# Altium PCB PCB1_ASCII.pcbdoc (part 1 of 2)
Units mm, origin at the board's own origin, x right, y up, seen from the top; angles counter-clockwise.
Board outline 100 x 24 mm, 4 copper layers (Top Layer 1, GND, VCC, Bottom Layer 1), stack 0.567 mm thick; 90 components, 59 nets, 339 pads, 337 vias.
Unrouted connection lines stored in the file: 82.
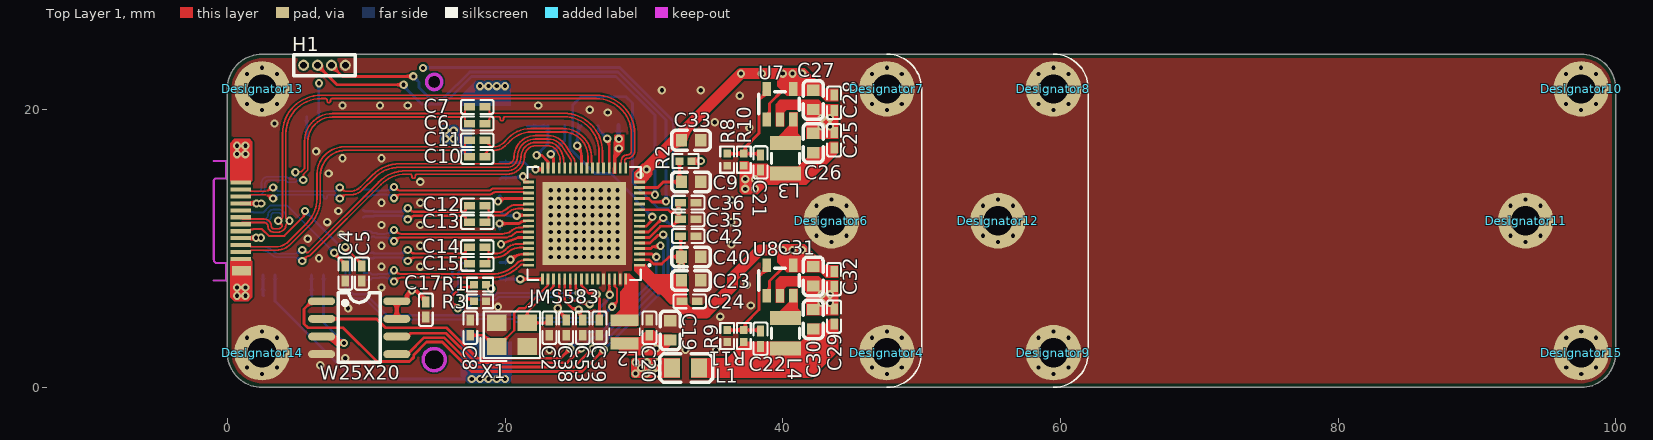
[diagram p0: Top Layer 1 view]
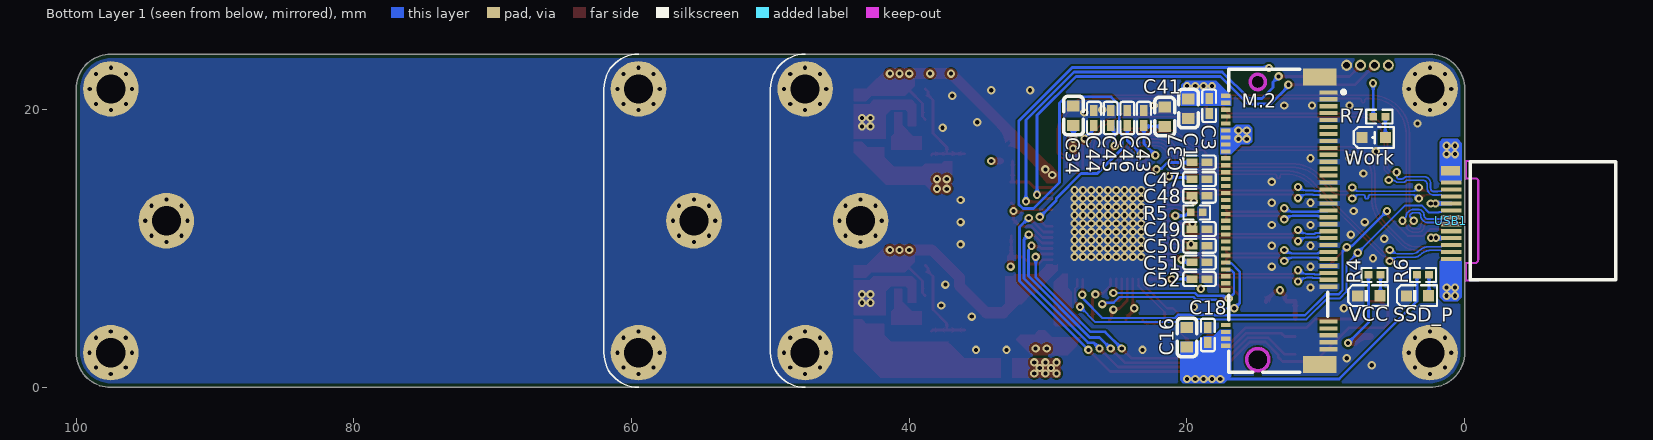
[diagram p1: Bottom Layer 1 view, seen from below]
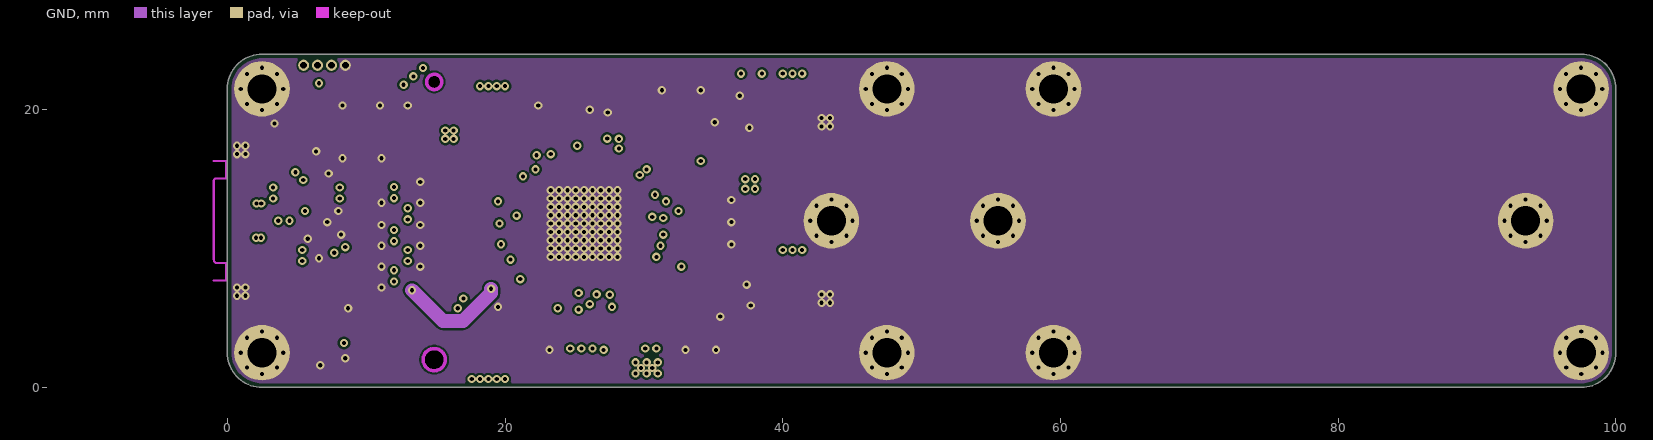
[diagram p2: GND]
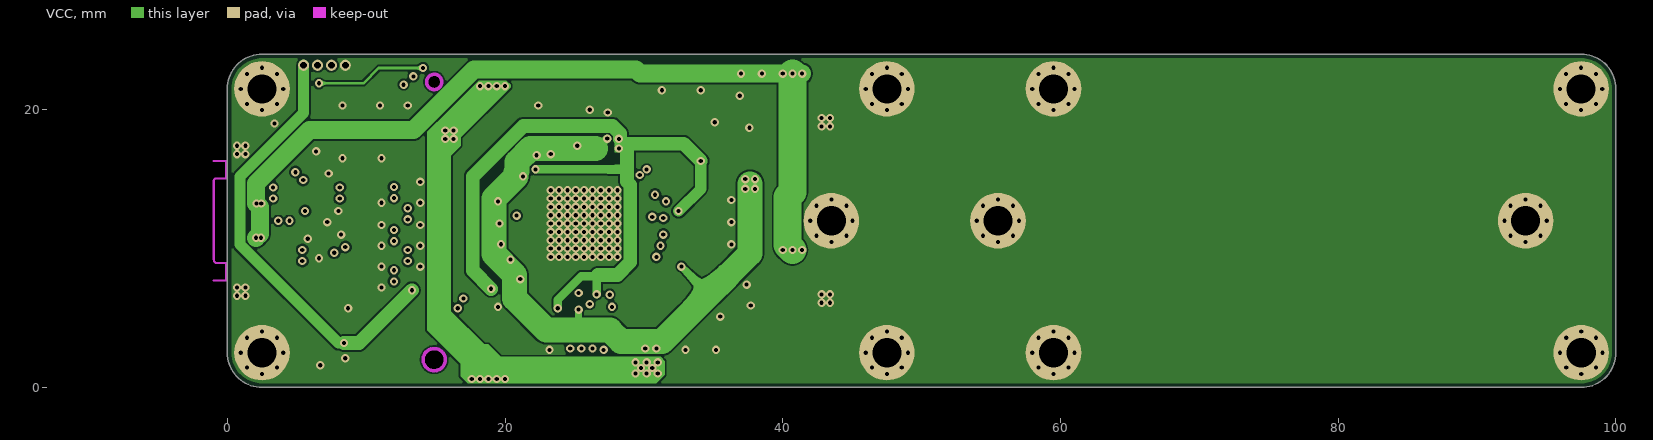
[diagram p3: VCC]

## Layer stack, top to bottom
Top Solder Mask Layer: solder mask 0.0102, Solder Resist, Dk 3.5
Top Layer 1: signal copper 0.035
Dielectric 1: prepreg 0.0711, PP-006, Dk 4.1
GND: signal copper 0.0175
Dielectric1: dielectric 0.32, FR-4, Dk 4.8
VCC: signal copper 0.0175
Dielectric 2: prepreg 0.0711, PP-006, Dk 4.1
Bottom Layer 1: signal copper 0.035
Bottom Solder Mask Layer: solder mask 0.0102, Solder Resist, Dk 3.5

## Board outline
0,2.5 0,21.5 cw(c2.5,21.5) 2.5,24 97.5,24 cw(c97.5,21.5) 100,21.5 100,2.5 cw(c97.5,2.5) 97.5,0 2.5,0 cw(c2.5,2.5)

## Design rules (kind name [scope] priority, off if disabled: settings)
BoardOutlineClearance copperThickness1oz_1 [All] p1: gap=0.254 ignorepadtopadclearanceinfootprint=FALSE except(0: Arc-SplitContinuation Track-SplitContinuation SMDPad-SplitContinuation THPad-SplitContinuation Via-SplitContinuation Fill-SplitContinuation Poly-SplitContinuation Region-SplitContinuation Text-SplitContinuation; 0.152: Track-CutoutEdge SMDPad-CutoutEdge THPad-CutoutEdge Via-CutoutEdge Region-CutoutEdge; 0.3: Track-OutlineEdge SMDPad-OutlineEdge THPad-OutlineEdge Via-OutlineEdge Fill-OutlineEdge Fill-CutoutEdge Poly-OutlineEdge Region-OutlineEdge Text-OutlineEdge)
BoardOutlineClearance copperThickness2oz_1 [All] p2: gap=0.254 ignorepadtopadclearanceinfootprint=FALSE except(0: Arc-SplitContinuation Track-SplitContinuation SMDPad-SplitContinuation THPad-SplitContinuation Via-SplitContinuation Fill-SplitContinuation Poly-SplitContinuation Region-SplitContinuation Text-SplitContinuation; 0.152: Track-CutoutEdge SMDPad-CutoutEdge THPad-CutoutEdge Via-CutoutEdge Region-CutoutEdge; 0.3: Track-OutlineEdge SMDPad-OutlineEdge THPad-OutlineEdge Via-OutlineEdge Fill-OutlineEdge Fill-CutoutEdge Poly-OutlineEdge Region-OutlineEdge Text-OutlineEdge)
Clearance "Stitching GND" [IsStitchingVia and InNet('GND') vs (IsVia and (Not IsStitchingVia)) Or IsPad] p1: gap=0.2 ignorepadtopadclearanceinfootprint=FALSE except(0: Arc-Text Arc-Hole Track-Text Track-Hole SMDPad-Text SMDPad-Hole THPad-Text THPad-Hole Via-Text Via-Hole Fill-Text Fill-Hole Poly-Text Poly-Hole Region-Text Region-Hole Text-Text Text-Hole)
Clearance copperThickness1oz [All] p2: gap=0.15 ignorepadtopadclearanceinfootprint=FALSE except(0: Arc-Text Arc-Hole Track-Text Track-Hole SMDPad-Via SMDPad-Text SMDPad-Hole THPad-Via THPad-Text THPad-Hole Via-Text Via-Hole Fill-Text Fill-Hole Poly-Text Poly-Hole Region-Text Region-Hole Text-Text Text-Hole; 0.12: Arc-Arc Arc-Track Arc-Via Track-Track Track-Via; 0.2: Via-Via)
ComponentClearance [All] p1: gap=0 collisioncheckmode=3 verticalgap=0.254 showdistances=FALSE
DiffPairsRouting DiffPairsRouting_90oum [InDifferentialPairClass('90oum')] p1: maxlimit=0.254 minlimit=0.1 mostfreqgap=0.12 toplayer_minwidth=0.1 toplayer_maxwidth=0.381 toplayer_prefwidth=0.125 midlayer1_minwidth=0.1 midlayer1_maxwidth=0.381 midlayer1_prefwidth=0.125 midlayer2_minwidth=0.1 midlayer2_maxwidth=0.381 midlayer2_prefwidth=0.125 bottomlayer_minwidth=0.1 bottomlayer_maxwidth=0.381 bottomlayer_prefwidth=0.125 maxuncoupledlength=12.7
DiffPairsRouting DiffPairsRouting_85oum [InDifferentialPairClass('85oum')] p2: maxlimit=0.254 minlimit=0.1 mostfreqgap=0.12 toplayer_minwidth=0.1 toplayer_maxwidth=0.381 toplayer_prefwidth=0.145 midlayer1_minwidth=0.1 midlayer1_maxwidth=0.381 midlayer1_prefwidth=0.145 midlayer2_minwidth=0.1 midlayer2_maxwidth=0.381 midlayer2_prefwidth=0.145 bottomlayer_minwidth=0.1 bottomlayer_maxwidth=0.381 bottomlayer_prefwidth=0.145 maxuncoupledlength=12.7
MatchedLengths [All] p1: tolerance=2 checknetsindiffpair=FALSE checkdiffpairvsdiffpair=TRUE checkxsignals=TRUE checkothers=TRUE
PasteMaskExpansion pasteMaskExpansion [All] p1: expansion=0
PlaneConnect innerPlane [All] p1: planeconnectstyle=Direct reliefexpansion=0.508 reliefentries=4 reliefconductorwidth=0.254 reliefairgap=0.254
PolygonConnect copperRegion [All] p1: connectstyle=Direct reliefconductorwidth=0.254 reliefentries=4 polygonreliefangle="90 Angle" airgapwidth=0.254
RoutingVias viaSize [All] p1: holewidth=0.305 width=0.61 viastyle="Through Hole" minholewidth=0.3 minwidth=0.5 maxholewidth=6.3 maxwidth=10
SilkToSilkClearance [All] p1: silktosilkclearance=0
SilkToSolderMaskClearance [IsPad] p1: minsilkscreentomaskgap=0 clearancetoexposedcopper=TRUE
SolderMaskExpansion solderMaskExpansion [All] p1: expansion=0.051 istentingtop=FALSE useseparateexpansions=TRUE expansionbottom=0.051 istentingbottom=FALSE
SupplyNets "Schematic Supply Nets_5" [InNet('VCC')] p1: voltage=0.000
SupplyNets "Schematic Supply Nets_4" [InNet('M.2_3V3')] p2: voltage=0.000
SupplyNets "Schematic Supply Nets_3" [InNet('AVDDL')] p3: voltage=0.000
SupplyNets "Schematic Supply Nets_2" [InNet('GND')] p4: voltage=0.000
SupplyNets "Schematic Supply Nets_1" [InNet('VDDREG')] p5: voltage=0.000
SupplyNets "Schematic Supply Nets" [InNet('3V3')] p6: voltage=0.000
Width copperThickness1oz_2 [All] p1: maxlimit=2.54 minlimit=0.127 preferedwidth=0.254
24 further rules are at their usual default settings.

## Classes and differential pairs
differential pair class 85oum: CLK N_P0_TX N_P1_TX P0_RX P0_TX P1_RX P1_TX
differential pair class 90oum: D RX1 RX2 TX1 TX2 U_TX1 U_TX2
component class 1_P1: C1 C2 C3 C4 C5 C6 C7 C8 C9 C10 C11 C12 C13 C14 C15 C16 C17 C18 C19 C20 C21 C22 C23 C24 C25 C26 C27 C28 C29 C30 C31 C32 C33 C34 C35 C36 C37 C38 C39 C40 C41 C42 C43 C44 C45 C46 C47 C48 C49 C50 C51 C52 C53 H1 JMS583 L1 L2 L3 L4 M.2 R1 R2 R3 R4 R5 R6 R7 R8 R9 R10 R11 SSD_P U7 U8 USB1 VCC W25X20 Work X1
differential pair U_TX2: +U_TX2_P -U_TX2_N
differential pair N_P1_TX: +N_P1_TX_P -N_P1_TX_N
differential pair N_P0_TX: +N_P0_TX_N -N_P0_TX_P
differential pair U_TX1: +U_TX1_P -U_TX1_N
differential pair P1_TX: +P1_TX_P -P1_TX_N
differential pair P1_RX: +P1_RX_P -P1_RX_N
differential pair P0_TX: +P0_TX_P -P0_TX_N
differential pair P0_RX: +P0_RX_P -P0_RX_N
differential pair CLK: +CLK_P -CLK_N
differential pair TX2: +TX2_P -TX2_N
differential pair TX1: +TX1_P -TX1_N
differential pair RX2: +RX2_P -RX2_N
differential pair RX1: +RX1_P -RX1_N
differential pair D: +D_P -D_N

## Components (designator, comment, footprint, x,y, rotation, side; value= is the part's Value field where it differs from the comment)
C1 "10uF" C0603 19.9,20.075 r270 bottom
C2 "20pF" C0402 23.2,4.3 r90 top
C3 "100nF" C0402 18.4,20.275 r90 bottom
C4 "330pF" C0402 8.5,8.2 r270 top
C5 "330pF" C0402 9.7,8.2 r270 top
C6 "100nF" C0402 18,19 r0 top
C7 "100nF" C0402 18,20.2 r0 top
C8 "20pF" C0402 17.5,4.3 r270 top
C9 "10uF" C0603 33.4,14.8 r180 top
C10 "100nF" C0402 18,16.6 r0 top
C11 "100nF" C0402 18,17.8 r0 top
C12 "220nF" C0402 18,13.1 r180 top
C13 "220nF" C0402 18,11.9 r180 top
C14 "220nF" C0402 18,10.1 r180 top
C15 "220nF" C0402 18,8.9 r180 top
C16 "10uF" C0603 20,3.6 r90 bottom
C17 "100nF" C0402 14.3,5.6 r90 top
C18 "100nF" C0402 18.5,3.775 r270 bottom
C19 "10uF" C0603 31.9,4.1 r270 top
C20 "100nF" C0402 30.4,4.3 r270 top
C21 "22pF" C0402 38.4,16.2 r90 top
C22 "22pF" C0402 38.4,3.5 r90 top
C23 "10uF" C0603 33.4,7.7 r180 top
C24 "100nF" C0402 33.3,6.2 r180 top
C25 "100nF" C0402 43.7,17.8 r270 top
C26 "10uF" C0603 42.2,17.6 r270 top
C27 "10uF" C0603 42.2,20.7 r90 top
C28 "100nF" C0402 43.7,20.5 r90 top
C29 "100nF" C0402 43.7,5.1 r270 top
C30 "10uF" C0603 42.2,4.9 r270 top
C31 "10uF" C0603 42.2,8 r90 top
C32 "100nF" C0402 43.7,7.8 r90 top
C33 "1uF" C0603 33.4,17.8 r180 top
C34 "1uF" C0603 28.175,19.575 r270 bottom
C35 "100nF" C0402 33.2,12.1 r180 top
C36 "100nF" C0402 33.2,13.3 r180 top
C37 "100nF" C0402 19.1,16.2 r0 bottom
C38 "100nF" C0402 24.4,4.3 r90 top
C39 "100nF" C0402 26.8,4.3 r90 top
C40 "4.7uF" C0603 33.4,9.4 r180 top
C41 "4.7uF" C0603 21.6,19.5 r270 bottom
C42 "100nF" C0402 33.2,10.9 r180 top
C43 "100nF" C0402 23.1,19.4 r270 bottom
C44 "100nF" C0402 26.7,19.4 r270 bottom
C45 "100nF" C0402 25.5,19.4 r270 bottom
C46 "100nF" C0402 24.3,19.4 r270 bottom
C47 "100nF" C0402 19.1,15 r0 bottom
C48 "100nF" C0402 19.1,13.8 r0 bottom
C49 "100nF" C0402 19.1,11.4 r0 bottom
C50 "100nF" C0402 19.1,10.2 r0 bottom
C51 "100nF" C0402 19.1,9 r0 bottom
C52 "100nF" C0402 19.1,7.8 r0 bottom
C53 "100nF" C0402 25.6,4.3 r90 top
Designator4 "Comment" M2_HOLE 47.5,2.5 r0 top
Designator6 "Comment" M2_HOLE 43.503,12 r0 top
Designator7 "Comment" M2_HOLE 47.5,21.5 r0 top
Designator8 "Comment" M2_HOLE 59.5,21.5 r0 top
Designator9 "Comment" M2_HOLE 59.5,2.5 r0 top
Designator10 "Comment" M2_HOLE 97.5,21.5 r0 top
Designator11 "Comment" M2_HOLE 93.5,12 r0 top
Designator12 "Comment" M2_HOLE 55.503,12 r0 top
Designator13 "Comment" M2_HOLE 2.5,21.5 r0 top locked
Designator14 "Comment" M2_HOLE 2.5,2.5 r0 top locked
Designator15 "Comment" M2_HOLE 97.503,2.5 r0 top
H1 "ZX-PZ1.0-1-4PZZ" HDR-TH_ZX-PZ1.0-1-4PZZ 7,23.2 r0 top
JMS583 "JMS583" QFN-64_L8.0-W8.0-P0.40-TL-EP6.0 25.7,11.8 r180 top locked (schematic designator U6)
L1 "BLM21PG600SN1D" L0805 33,1.4 r180 top
L2 "4.7uH" IND-SMD_L2.5-W2.0-VLS252012CX-150M 28.6,4 r90 top
L3 "2.2uH" IND-SMD_L2.5-W2.0_MHCHL2520 40.2,16.5 r90 top
L4 "2.2uH" IND-SMD_L2.5-W2.0_MHCHL2520 40.2,3.9 r90 top
M.2 "91302-225-067RCM" CONN-SMD_91302-225-067RCM 13.5,12 r270 bottom locked (schematic designator U1)
R1 "4.7kΩ" R0402 18.2,7.4 r0 top
R2 "50k" R0402 33,16.3 r180 top
R3 "4.7kΩ" R0402 18.2,6.2 r0 top
R4 "10kΩ" R0402 6.5,8.1 r180 bottom
R5 "12kΩ_1%" R0402 19.3,12.6 r180 bottom
R6 "10kΩ" R0402 3,8.1 r180 bottom
R7 "10kΩ" R0402 6.149,19.496 r180 bottom
R8 "150kΩ_1%" R0402 36,16.4 r90 top
R9 "22.1kΩ_1%" R0402 36,3.7 r90 top
R10 "100kΩ_1%" R0402 37.2,16.4 r270 top
R11 "100kΩ_1%" R0402 37.2,3.7 r270 top
SSD_P "LED_绿" LED0603-RD_GREEN 3.4,6.6 r180 bottom (schematic designator U3)
U7 "ETA3409S2F" SOT-23-5_L2.9-W1.6-P0.95-LS2.8-BL 39.8,20.4 r0 top
U8 "ETA3409S2F" SOT-23-5_L2.9-W1.6-P0.95-LS2.8-BL 39.8,7.7 r0 top
USB1 "U261-241N-4BS60" USB-TYPE-C-SMD_U261-241N-4BS60 1,12 r90 bottom locked
VCC "LED_绿" LED0603-RD_GREEN 6.9,6.6 r180 bottom (schematic designator U2)
W25X20 "W25X20CLSNIG" SOIC-8_L5.0-W4.0-P1.27-LS6.0-BL 9.5,4.3 r270 top (schematic designator U4)
Work "LED_蓝" LED0603-R-RD 6.549,17.996 r180 bottom (schematic designator U5)
X1 "25MHz" CRYSTAL-SMD_4P-L3.2-W2.5-BL 20.5,3.8 r0 top

## Footprints (in the part's own frame and the unit in brackets; to place one, negate y for a bottom-side part, rotate by r counter-clockwise, add the part's x,y. Pads: shape width x height; smd on the part's side, far side on the other; paste and mask are expansions set on the pad)
C0402 [mm]
  rect 0.79x0.54 smd paste-100 mask+0.051: 1(-0.545,0) 2(0.545,0)
  silkscreen extent -1.17,-0.5 1.17,0.5
C0603 [mm]
  rect 0.8x0.9 smd: 1(-0.7,0) 2(0.7,0)
  silkscreen extent -1.39,-0.71 1.39,0.71
CONN-SMD_91302-225-067RCM [mm]
  rect 0.3x1.3 smd: 1(-9.25,3.7) 3(-8.75,3.7) 5(-8.25,3.7) 7(-7.75,3.7) 9(-7.25,3.7) 11(-6.75,3.7) 13(-6.25,3.7) 15(-5.75,3.7) 17(-5.25,3.7) 19(-4.75,3.7) 21(-4.25,3.7) 23(-3.75,3.7) 25(-3.25,3.7) 27(-2.75,3.7) 29(-2.25,3.7) 31(-1.75,3.7) 33(-1.25,3.7) 35(-0.75,3.7) 37(-0.25,3.7) 39(0.25,3.7) 41(0.75,3.7) 43(1.25,3.7) 45(1.75,3.7) 47(2.25,3.7) 49(2.75,3.7) 51(3.25,3.7) 53(3.75,3.7) 55(4.25,3.7) 57(4.75,3.7) 67(7.25,3.7) 69(7.75,3.7) 71(8.25,3.7) 73(8.75,3.7) 75(9.25,3.7)
  rect 0.3x0.7 smd: 2(-9,-3.7) 4(-8.5,-3.7) 6(-8,-3.7) 8(-7.5,-3.7) 10(-7,-3.7) 12(-6.5,-3.7) 14(-6,-3.7) 16(-5.5,-3.7) 18(-5,-3.7) 20(-4.5,-3.7) 22(-4,-3.7) 24(-3.5,-3.7) 26(-3,-3.7) 28(-2.5,-3.7) 30(-2,-3.7) 32(-1.5,-3.7) 34(-1,-3.7) 36(-0.5,-3.7) 38(0,-3.7) 40(0.5,-3.7) 42(1,-3.7) 44(1.5,-3.7) 46(2,-3.7) 48(2.5,-3.7) 50(3,-3.7) 52(3.5,-3.7) 54(4,-3.7) 56(4.5,-3.7) 58(5,-3.7) 68(7.5,-3.7) 70(8,-3.7) 72(8.5,-3.7) 74(9,-3.7)
  rect 1.2x2.4 smd: 76(-10.35,3.05) 77(10.35,3.05)
  Board Outline Layer board cut-out: 10.8,-1.4 10.8,-1.295 10.745,-1.091 10.64,-0.909 10.491,-0.76 10.309,-0.655 10.105,-0.6 9.895,-0.6 9.691,-0.654 9.509,-0.76 9.36,-0.909 9.254,-1.091 9.2,-1.295 9.2,-1.4 9.2,-1.505 9.254,-1.709 9.36,-1.891 9.509,-2.04 9.691,-2.146 9.895,-2.2 10.105,-2.2 10.309,-2.146 10.491,-2.04 10.64,-1.891 10.745,-1.709 10.8,-1.505 10.8,-1.4
  Board Outline Layer board cut-out: -9.45,-1.4 -9.45,-1.291 -9.534,-1.088 -9.688,-0.934 -9.891,-0.85 -10.109,-0.85 -10.312,-0.934 -10.466,-1.088 -10.55,-1.291 -10.55,-1.4 -10.55,-1.509 -10.466,-1.712 -10.312,-1.866 -10.109,-1.95 -9.891,-1.95 -9.688,-1.866 -9.534,-1.712 -9.45,-1.509 -9.45,-1.4
  Board Outline Layer circle w0.254: c10,-1.4 r0.8
  Board Outline Layer circle w0.005: c10,-1.4 r0.8
  Board Outline Layer circle w0.254: c-10,-1.4 r0.55
  Board Outline Layer circle w0.005: c-10,-1.4 r0.55
  silkscreen extent -10.92,-3.5 10.92,4.9
CRYSTAL-SMD_4P-L3.2-W2.5-BL [mm]
  rect 1.4x1.2 smd: 1(-1.1,-0.85) 2(1.1,-0.85) 3(1.1,0.85) 4(-1.1,0.85)
  silkscreen extent -2.26,-1.91 2.03,1.68
HDR-TH_ZX-PZ1.0-1-4PZZ [mm]
  round 0.8 hole 0.5: 1(-1.5,0) 2(-0.5,0) 3(0.5,0) 4(1.5,0)
  silkscreen extent -2.2,-0.75 2.2,0.75
IND-SMD_L2.5-W2.0-VLS252012CX-150M [mm]
  rect 0.85x2 smd: 1(-0.83,0) 2(0.83,0)
  silkscreen extent -0.29,-1.1 0.29,1.1
IND-SMD_L2.5-W2.0_MHCHL2520 [mm]
  rect 1x2.2 smd: 1(-1.1,0) 2(1.1,0)
  silkscreen extent -0.37,-1 0.37,1
L0805 [mm]
  rect 1.133x1.377 smd paste-100 mask+0.051: 1(-0.966,0) 2(0.966,0)
  silkscreen extent -1.95,-1.02 1.86,1.02
LED0603-R-RD [mm]
  rect 0.8x0.8 smd: 1(0.851,0) 2(-0.851,0)
  silkscreen extent -1.44,-0.75 1.44,0.75
LED0603-RD_GREEN [mm]
  rect 0.8x0.8 smd: 1(-0.799,-0.003) 2(0.799,0.003)
  silkscreen extent -1.49,-0.75 1.39,0.76
M2_HOLE [mm]
  round 4 hole 2.1: 16(0,0)
QFN-64_L8.0-W8.0-P0.40-TL-EP6.0 [mm]
  rect 0.8x0.2 smd paste-100 mask+0.051: 1(-4,3) 2(-4,2.6) 3(-4,2.2) 4(-4,1.8) 5(-4,1.4) 6(-4,1) 7(-4,0.6) 8(-4,0.2) 9(-4,-0.2) 10(-4,-0.6) 11(-4,-1) 12(-4,-1.4) 13(-4,-1.8) 14(-4,-2.2) 15(-4,-2.6) 16(-4,-3) 33(4,-3) 34(4,-2.6) 35(4,-2.2) 36(4,-1.8) 37(4,-1.4) 38(4,-1) 39(4,-0.6) 40(4,-0.2) 41(4,0.2) 42(4,0.6) 43(4,1) 44(4,1.4) 45(4,1.8) 46(4,2.2) 47(4,2.6) 48(4,3)
  rect 0.2x0.8 smd paste-100 mask+0.051: 17(-3,-4) 18(-2.6,-4) 19(-2.2,-4) 20(-1.8,-4) 21(-1.4,-4) 22(-1,-4) 23(-0.6,-4) 24(-0.2,-4) 25(0.2,-4) 26(0.6,-4) 27(1,-4) 28(1.4,-4) 29(1.8,-4) 30(2.2,-4) 31(2.6,-4) 32(3,-4) 49(3,4) 50(2.6,4) 51(2.2,4) 52(1.8,4) 53(1.4,4) 54(1,4) 55(0.6,4) 56(0.2,4) 57(-0.2,4) 58(-0.6,4) 59(-1,4) 60(-1.4,4) 61(-1.8,4) 62(-2.2,4) 63(-2.6,4) 64(-3,4)
  rect 6x6 smd paste-100 mask+0.051: 65(0,0)
  silkscreen extent -4.77,-4.08 4.08,4.08
R0402 [mm]
  rect 0.566x0.54 smd paste-100 mask+0.051: 1(-0.433,0) 2(0.433,0)
  silkscreen extent -0.94,-0.5 0.94,0.5
SOIC-8_L5.0-W4.0-P1.27-LS6.0-BL [mil]
  oval 22.38x76.78 smd: 1(-75,-106.5) 2(-25,-106.5) 3(25,-106.5) 4(75,-106.5) 5(75,106.5) 6(25,106.5) 7(-25,106.5) 8(-75,106.5)
  silkscreen extent -98,-59 98,59
SOT-23-5_L2.9-W1.6-P0.95-LS2.8-BL [mm]
  rect 0.6x1 smd paste+0 mask+0.05: 1(-0.95,-1.1) 2(0,-1.1) 3(0.95,-1.1) 4(0.95,1.1) 5(-0.95,1.1)
  silkscreen extent -1.52,-0.7 1.4,0.89
USB-TYPE-C-SMD_U261-241N-4BS60 [mm]
  rect 0.7x1.4 smd far side paste+0 mask+0.05: 1(-3.6,0.025)
  rect 0.7x1.4 smd paste+0 mask+0.05: 2(3.6,0.025)
  rect 0.3x1.5 smd paste+0 mask+0.05: A1(2.75,-0.025) A2(2.25,-0.025) A3(1.75,-0.025) A4(1.25,-0.025) A5(0.75,-0.025) A6(0.25,-0.025) A7(-0.25,-0.025) A8(-0.75,-0.025) A9(-1.25,-0.025) A10(-1.75,-0.025) A11(-2.25,-0.025) A12(-2.75,-0.025)
  rect 0.3x1.5 smd far side paste+0 mask+0.05: B1(-2.75,-0.025) B2(-2.25,-0.025) B3(-1.75,-0.025) B4(-1.25,-0.025) B5(-0.75,-0.025) B6(-0.25,-0.025) B7(0.25,-0.025) B8(0.75,-0.025) B9(1.25,-0.025) B10(1.75,-0.025) B11(2.25,-0.025) B12(2.75,-0.025)
  Board Outline Layer lines w0.15: 2.86,-1.975 ccw(c2.86,-1.785) 3.05,-1.785 ; 2.86,-1.975 ccw(c2.86,-1.785) 3.05,-1.785 ; 2.86,-1.975 -2.741,-1.975 2.86,-1.975 ; 3.05,-1.785 3.05,-1.075 ; 3.05,-1.785 3.05,-1.075 ; -3.05,-1.719 ccw(c-2.794,-1.719) -2.794,-1.975 cw(c-2.794,-1.719) -3.05,-1.719 ; -3.05,-1.719 -3.05,-1.7 ; -3.05,-1.719 -3.05,-1.7 ; -3.05,-1.7 -3.05,-1.075 ; -3.05,-1.7 -3.05,-1.075 ; -4.3,-1.075 -4.3,-1.975 -4.3,-1.075 ; -4.3,-1.075 -3.05,-1.075 ; -4.3,-1.075 -3.05,-1.075 ; 3.05,-1.075 4.3,-1.075 ; 3.05,-1.075 4.3,-1.075 ; 4.3,-1.075 4.3,-1.975 4.3,-1.075
  silkscreen extent -4.25,-11.89 4.25,-1.38

## Part data
C1 C9 C16 C19 C23 C26 C27 C30 C31 C33 C34 C40 C41: library part CAP_0603
C2 C3 C4 C5 C6 C7 C8 C10 C11 C12 C13 C14 C15 C17 C18 C20 C21 C22 C24 C25 C28 C29 C32 C35 C36 C37 C38 C39 C42 C43 C44 C45 C46 C47 C48 C49 C50 C51 C52 C53: library part CL05B104KB54PNC
L2: library part FTC252010S4R7MBCA
L3 L4: library part FTC252012S2R2MBCA
R1 R2 R3 R4 R5 R6 R7 R8 R9 R10 R11: library part 0402WGF1002TCE
SSD_P VCC: library part XL-1608PGC-06
Work: library part XL-1608UBC-06A
X1: library part XL2EL89CSI-111YLC-25M

## Via types
v1: diameter 0.6, hole 0.3, Top Layer 1 to Bottom Layer 1, 337 vias

## Nets (pads, with @x,y where several pads share a name; then routed paths per layer and width w, separated by ;. In a path a pad name is that pad's centre, name@x,y a point inside that pad or via, vN(x,y) a via of type N, cw(c..) or ccw(c..) an arc to the next point about the centre after c; other vN are vias at no path point)
3V3: C22.1 C29.2 C30.2 L1.1 L4.1 R11.2
AVDDL: C19.2 C20.2 C21.1 C25.2 C26.2 C40.2 C41.2 C42.2 C43.2 C44.2 C45.2 C46.2 C47.2 C48.2 C49.2 C50.2 C51.2 C52.2 C53.2 JMS583.2 JMS583.20 JMS583.25 JMS583.30 JMS583.31 JMS583.33 JMS583.36 JMS583.40 JMS583.43 JMS583.46 JMS583.49 JMS583.53 L2.1 L3.1 R10.2 | length 89.4
  Top Layer 1 w0.2: v1(19.5,13.4) cw(c19.983,12.917) 19.983,13.6 JMS583.36@21.7,13.6 ; v1(19.6,11.8) 20.904,11.8 ccw(c20.903,12) 20.938,11.803 cw(c21.21,10.285) 21.003,11.813 ccw(c20.975,12.011) 21.119,11.872 cw(c21.3,11.7) 21.27,11.948 JMS583.40@21.7,12 ; v1(19.717,10.308) 19.923,10.402 cw(c20.007,10.22) 19.938,10.408 20.429,10.588 ccw(c19.976,11.824) 20.458,10.599 20.934,10.786 cw(c21.007,10.6) 21.007,10.8 JMS583.43@21.7,10.8 ; v1(20.4,9.2) cw(c21.366,8.234) 21.366,9.6 JMS583.46@21.7,9.6 ; v1(21.1,7.8) JMS583.49@22.7,7.8 ; v1(21.3,15.2) 21.3,15.092 21.4,14.992 21.4,14.8 JMS583.33@21.7,14.8 ; v1(22.277,16.723) 22.63,16.723 23.1,16.253 JMS583.31@23.1,15.8 ; v1(23.3,16.8) 23.3,16.698 23.5,16.498 JMS583.30@23.5,15.8 ; JMS583.53@24.3,7.8 24.3,6.27 24.911,5.659 25.241,5.659 v1(25.3,5.6) 25.3,5.492 25.43,5.362 25.43,5.015 C53.2@25.6,4.845 ; v1(25.2,17.4) cw(c24.475,16.675) 25.5,16.675 JMS583.25@25.5,15.8 ; v1(27.361,17.919) 27.459,17.651 cw(c26.817,17.417) 27.5,17.417 JMS583.20@27.5,15.8 ; JMS583.2@29.7,9.2 30.365,9.2 30.685,8.88 31.282,8.88 31.802,9.4 C40.2@32.7,9.4 v1(32.7,8.7) ; C40.2@32.655,9.445 C42.2@32.655,10.9
  Top Layer 1 w0.5: C40.2@32.655,9.445 C40.2@32.7,9.4 v1(32.7,8.7)
  VCC w0.5: 25.263,4.12 25.3,4.157 v1(25.3,5.6) ; v1(32.7,8.7) 34.7,6.7
  VCC w0.6: 26.5,17.2 26.642,17.2 v1(27.361,17.919)
  VCC w1.8: 26.5,17.2 21.833,17.2 20.88,16.247 20.88,15.58 20.8,15.5 20.8,15.2 19.2,13.6 19.2,9.6 20.7,8.1 20.7,6.4 22.98,4.12 25.263,4.12 27.547,4.12 28.367,3.3 31.3,3.3 34.7,6.7 37.656,9.656 37.656,14.664
  Bottom Layer 1 w0.172: v1(19.5,13.4) 19.5,13.655 C48.2@19.645,13.8 19.715,13.73 C48.2@19.715,13.615
  Bottom Layer 1 w0.2: v1(19.6,11.8) 19.6,11.509 ccw(c19.754,11.509) C49.2@19.645,11.4 ; C52.2@19.645,7.8 v1(21.1,7.8) ; C51.2@19.645,9 19.917,9 ccw(c19.917,9.683) v1(20.4,9.2) ; C47.2@19.645,15 19.769,15.123 21.223,15.123 v1(21.3,15.2) ; C41.2@21.6,18.8 23.045,18.8 C43.2@23.1,18.855 23.1,17.547 v1(22.277,16.723) ; v1(23.3,16.8) 24.3,17.8 C46.2@24.3,18.855 ; v1(25.2,17.4) 25.2,18.131 cw(c26.224,18.131) C45.2@25.5,18.855 ; C44.2@26.7,18.855 ccw(c27.364,18.855) 26.894,18.386 v1(27.361,17.919)
  other v1: 30.1,2.8 30.9,2.8 37.3,14.3 38,14.3 37.3,15 38,15
CC1: C4.1 JMS583.62 USB1.A5 | length 35.6
  Top Layer 1 w0.15: v1(27.7,5.8) 28.075,6.175 28.075,7.117 27.905,7.287 27.905,7.795 JMS583.62@27.9,7.8
  Top Layer 1 w0.17: v1(7.7,9.7) 7.7,9.67 8.5,8.87 C4.1@8.5,8.745
  Bottom Layer 1 w0.15: USB1.A5@0.975,12.75 1.575,12.75 1.69,12.635 1.822,12.635 1.857,12.6 2.578,12.6 3.065,13.088 4.312,13.088 v1(7.7,9.7) 8.52,8.88 8.52,6.884 9.004,6.4 9.904,6.4 11.404,4.9 18.097,4.9 18.137,4.94 20.529,4.94 20.768,4.7 26.6,4.7 v1(27.7,5.8)
CC2: C5.1 JMS583.61 USB1.B5 | length 36.4
  Top Layer 1 w0.15: USB1.B5@0.975,11.25 1.575,11.25 1.69,11.365 1.822,11.365 1.857,11.4 2.502,11.4 2.99,10.913 4.102,10.913 5.518,12.329 5.518,12.618 v1(5.6,12.7)
  Top Layer 1 w0.17: v1(8.5,10.1) 8.5,10.07 9.7,8.87 C5.1@9.7,8.745 ; JMS583.61@27.5,7.8 27.515,7.785 27.515,6.702 v1(27.54,6.677)
  Bottom Layer 1 w0.15: v1(5.6,12.7) 8.118,10.182
  Bottom Layer 1 w0.17: 8.118,10.182 8.418,10.182 v1(8.5,10.1) 8.5,10.085 8.8,9.785 8.8,7 9.1,6.7 10,6.7 11.505,5.195 17.996,5.195 18.021,5.22 20.645,5.22 20.864,5 26.1,5 27.458,6.358 27.458,6.594 v1(27.54,6.677)
CLK_N: JMS583.47 M.2.53 | length 12.4
  Top Layer 1 w0.145: v1(12,8.433) cw(c12,8.324) 12.077,8.401 12.179,8.299 ccw(c12.502,8.622) 12.502,8.165 19.038,8.165 ccw(c19.038,10.705) 20.834,8.909 20.897,8.972 cw(c21.285,8.584) 21.285,9.133 ccw(c21.285,9.248) 21.366,9.166 cw(c21.448,9.085) 21.448,9.2 JMS583.47@21.7,9.2
  Bottom Layer 1 w0.145: M.2.53@9.8,8.25 10.217,8.25 cw(c10.217,8.049) 10.359,8.191 ccw(c10.5,8.333) 10.5,8.133 10.774,8.133 ccw(c10.774,8.188) 10.813,8.149 cw(c10.853,8.11) 10.853,8.165 11.354,8.165 ccw(c11.354,8.97) 11.923,8.401 cw(c12,8.324) v1(12,8.433)
CLK_P: JMS583.48 M.2.55 | length 12.4
  Top Layer 1 w0.145: v1(12,7.633) ccw(c12,7.741) 12.077,7.664 12.179,7.766 cw(c12.502,7.443) 12.502,7.9 19.038,7.9 ccw(c19.038,10.705) 21.021,8.722 21.085,8.785 cw(c21.285,8.584) 21.285,8.868 cw(c21.285,8.752) 21.366,8.834 ccw(c21.448,8.915) 21.448,8.8 JMS583.48@21.7,8.8
  Bottom Layer 1 w0.145: M.2.55@9.8,7.75 10.217,7.75 ccw(c10.217,7.951) 10.359,7.809 cw(c10.5,7.667) 10.5,7.868 10.884,7.868 ccw(c10.884,7.923) 10.923,7.884 cw(c10.962,7.845) 10.962,7.9 11.354,7.9 cw(c11.354,7.095) 11.923,7.664 ccw(c12,7.741) v1(12,7.633)
D_N: JMS583.17 USB1.A7 USB1.B7 | length 46
  Top Layer 1 w0.125: USB1.B7@0.975,12.25 ccw(c1.102,12.25) 1.102,12.122 2.653,12.122 cw(c2.653,11.6) 3.175,11.6 ccw(c3.35,11.6) 3.35,11.425 3.674,11.425 ccw(c3.674,11.703) 3.871,11.507 3.916,11.551 ccw(c3.827,11.64) 3.952,11.64 ccw(c3.827,11.64) 3.916,11.728 3.697,11.947 cw(c3.75,12) v1(3.675,12) ; v1@3.697,12.053 ccw(c3.75,12) v1(3.675,12) ; JMS583.17@28.7,15.8 28.7,16.045 ccw(c28.568,16.045) 28.661,16.139 cw(c28.755,16.232) 28.622,16.232 28.622,16.322 cw(c28.8,16.322) 28.8,16.5 ccw(c28.8,17.045) 29.345,17.045 29.345,18.26 ccw(c26.56,18.26) 26.56,21.045 6.756,21.045 ccw(c6.756,18.261) 3.972,18.261 3.972,12.297 cw(c3.675,12.297) v1(3.675,12)
  Bottom Layer 1 w0.125: USB1.A7@0.975,11.75 cw(c1.102,11.75) 1.102,11.877 2.652,11.877 ccw(c2.652,12.4) 3.175,12.4 cw(c3.35,12.4) 3.35,12.575 3.674,12.575 cw(c3.674,12.297) 3.871,12.493 3.916,12.449 cw(c3.827,12.36) 3.952,12.36 cw(c3.827,12.36) 3.916,12.272 3.697,12.053 ccw(c3.75,12) v1(3.675,12)
D_P: JMS583.18 USB1.A6 USB1.B6 | length 46.3
  Top Layer 1 w0.125: USB1.B6@0.975,11.75 cw(c1.102,11.75) 1.102,11.877 2.653,11.877 cw(c2.653,11.6) 2.93,11.6 ccw(c3.35,11.6) 3.35,11.18 3.674,11.18 ccw(c3.674,11.703) 4.044,11.333 4.125,11.414 ccw(c3.95,11.589) 4.197,11.589 cw(c4.445,11.589) 4.27,11.764 4.453,11.947 ccw(c4.4,12) v1(4.475,12) ; v1@4.453,12.053 cw(c4.4,12) v1(4.475,12) ; JMS583.18@28.3,15.8 28.3,16.045 cw(c28.432,16.045) 28.339,16.139 ccw(c28.245,16.232) 28.377,16.232 28.377,16.322 cw(c28.8,16.322) 28.8,16.745 ccw(c28.8,17.045) 29.1,17.045 29.1,18.26 ccw(c26.56,18.26) 26.56,20.8 7.9,20.8 7.56,20.8 ccw(c7.56,20.675) 7.435,20.675 7.435,20.622 cw(c7.312,20.622) 7.312,20.5 cw(c7.312,20.622) 7.19,20.622 7.19,20.675 ccw(c7.065,20.675) 7.065,20.8 6.757,20.8 ccw(c6.757,18.26) 4.217,18.26 4.217,12.258 ccw(c4.475,12.258) v1(4.475,12)
  Bottom Layer 1 w0.125: USB1.A6@0.975,12.25 ccw(c1.102,12.25) 1.102,12.122 2.652,12.122 ccw(c2.652,12.4) 2.93,12.4 cw(c3.35,12.4) 3.35,12.82 3.674,12.82 cw(c3.674,12.297) 4.044,12.667 4.125,12.586 cw(c3.95,12.411) 4.197,12.411 ccw(c4.445,12.411) 4.27,12.236 4.453,12.053 cw(c4.4,12) v1(4.475,12)
GND: C1.2 C2.1 C3.1 C4.2 C5.2 C8.1 C9.1 C16.2 C17.1 C18.1 C19.1 C20.1 C23.1 C24.1 C25.1 C26.1 C27.1 C28.1 C29.1 C30.1 C31.1 C32.1 C33.1 C34.1 C35.1 C36.1 C37.1 C38.1 C39.1 C40.1 C41.1 C42.1 C43.1 C44.1 C45.1 C46.1 C47.1 C48.1 C49.1 C50.1 C51.1 C52.1 C53.1 Designator4.16 Designator6.16 Designator7.16 Designator8.16 Designator9.16 Designator10.16 Designator11.16 Designator12.16 Designator13.16 Designator14.16 Designator15.16 H1.4 JMS583.60 JMS583.63 JMS583.65 M.2.1 M.2.3 M.2.9 M.2.15 M.2.21 M.2.27 M.2.33 M.2.39 M.2.45 M.2.51 M.2.57 M.2.71 M.2.73 M.2.75 M.2.76 M.2.77 R3.2 R5.2 R8.1 R9.1 SSD_P.1 U7.2 U8.2 USB1.1 USB1.2 USB1.A1 USB1.A12 USB1.B1 USB1.B12 VCC.1 W25X20.4 Work.2 X1.2 X1.4
  other v1: 2.5,0.975 47.5,0.975 59.5,0.975 97.503,0.975 1.422,1.422 3.578,1.422 46.422,1.422 48.578,1.422 58.422,1.422 60.578,1.422 96.425,1.422 98.582,1.422 6.7,1.6 8.5,2.1 0.975,2.5 4.025,2.5 45.975,2.5 49.025,2.5 57.975,2.5 61.025,2.5 95.978,2.5 99.028,2.5 23.2,2.7 33,2.7 35.2,2.7 1.422,3.578 3.578,3.578 46.422,3.578 48.578,3.578 58.422,3.578 60.578,3.578 96.425,3.578 98.582,3.578 2.5,4.025 47.5,4.025 59.5,4.025 97.503,4.025 35.5,5.1 8.7,5.7 19.5,5.8 37.7,5.9 42.8,6.1 43.4,6.1 0.7,6.6 1.3,6.6 42.8,6.7 43.4,6.7 0.7,7.2 1.3,7.2 11.1,7.2 37.4,7.4 11.1,8.7 13.9,8.7 6.6,9.3 23.3,9.4 23.9,9.4 24.5,9.4 25.1,9.4 25.7,9.4 26.3,9.4 26.9,9.4 27.5,9.4 28.1,9.4 23.3,10 23.9,10 24.5,10 25.1,10 25.7,10 26.3,10 26.9,10 27.5,10 28.1,10 11.1,10.2 13.9,10.2 36.3,10.3 43.503,10.475 55.503,10.475 93.5,10.475 23.3,10.6 23.9,10.6 24.5,10.6 25.1,10.6 25.7,10.6 26.3,10.6 26.9,10.6 27.5,10.6 28.1,10.6 5.8,10.7 42.425,10.922 44.582,10.922 54.425,10.922 56.582,10.922 92.422,10.922 94.578,10.922 8.2,11 23.3,11.2 23.9,11.2 24.5,11.2 25.1,11.2 25.7,11.2 26.3,11.2 26.9,11.2 27.5,11.2 28.1,11.2 11.1,11.7 13.9,11.7 23.3,11.8 23.9,11.8 24.5,11.8 25.1,11.8 25.7,11.8 26.3,11.8 26.9,11.8 27.5,11.8 28.1,11.8 7.2,11.9 36.3,11.9 41.978,12 45.028,12 53.978,12 57.028,12 91.975,12 95.025,12 23.3,12.4 23.9,12.4 24.5,12.4 25.1,12.4 25.7,12.4 26.3,12.4 26.9,12.4 27.5,12.4 28.1,12.4 8,12.7 23.3,13 23.9,13 24.5,13 25.1,13 25.7,13 26.3,13 26.9,13 27.5,13 28.1,13 42.425,13.078 44.582,13.078 54.425,13.078 56.582,13.078 92.422,13.078 94.578,13.078 11.1,13.3 13.9,13.3 36.3,13.5 43.503,13.525 55.503,13.525 93.5,13.525 23.3,13.6 23.9,13.6 24.5,13.6 25.1,13.6 25.7,13.6 26.3,13.6 26.9,13.6 27.5,13.6 28.1,13.6 23.3,14.2 23.9,14.2 24.5,14.2 25.1,14.2 25.7,14.2 26.3,14.2 26.9,14.2 27.5,14.2 28.1,14.2 13.9,14.8 7.3,15.4 8.3,16.5 11.1,16.5 0.7,16.8 1.3,16.8 6.4,17 0.7,17.4 1.3,17.4 37.6,18.7 42.8,18.8 43.4,18.8 3.4,19 35.1,19.1 42.8,19.4 43.4,19.4 27.4,19.8 2.5,19.975 47.5,19.975 59.5,19.975 97.5,19.975 26.1,20 8.3,20.3 11,20.3 13,20.3 22.4,20.3 1.422,20.422 3.578,20.422 46.422,20.422 48.578,20.422 58.422,20.422 60.578,20.422 96.422,20.422 98.578,20.422 36.9,21 31.3,21.4 34.1,21.4 0.975,21.5 4.025,21.5 45.975,21.5 49.025,21.5 57.975,21.5 61.025,21.5 95.975,21.5 99.025,21.5 1.422,22.578 3.578,22.578 46.422,22.578 48.578,22.578 58.422,22.578 60.578,22.578 96.422,22.578 98.578,22.578 2.5,23.025 47.5,23.025 59.5,23.025 97.5,23.025
GPIO0: JMS583.3 W25X20.2 | length 30.4
  Top Layer 1 w0.2: W25X20.2@6.795,4.935 10.759,4.935 11.394,4.3 15.8,4.3 18,2.1 24,2.1 v1(24.7,2.8) ; JMS583.3@29.7,9.6 30.592,9.6 30.792,9.4 v1(30.9,9.4)
  Bottom Layer 1 w0.2: v1(24.7,2.8) 25.9,4 26.947,4 30.9,7.953 v1(30.9,9.4)
GPIO1: JMS583.4 W25X20.6 | length 26.6
  Top Layer 1 w0.2: W25X20.6@12.205,3.665 12.962,3.665 13.197,3.9 15.747,3.9 17.867,1.78 24.48,1.78 v1(25.5,2.8) ; JMS583.4@29.7,10 30.5,10 30.624,10.123 31.123,10.123 v1(31.2,10.2)
  Bottom Layer 1 w0.2: v1(25.5,2.8) 26.3,3.6 27,3.6 31.42,8.02 31.42,9.883 31.2,10.103 v1(31.2,10.2)
GPIO2: JMS583.5 W25X20.5 | length 28.8
  Top Layer 1 w0.2: W25X20.5@12.205,2.395 12.995,2.395 14.18,3.58 15.615,3.58 17.735,1.46 24.96,1.46 v1(26.3,2.8) ; JMS583.5@29.7,10.4 30.448,10.4 31,10.952 31.352,10.952 v1(31.4,11)
  Bottom Layer 1 w0.2: v1(26.3,2.8) 26.72,3.22 27.12,3.22 31.74,7.84 31.74,10.66 v1(31.4,11)
GPIO3: JMS583.7 W25X20.1 | length 41.4
  Top Layer 1 w0.2: W25X20.1@6.795,6.205 6.104,6.205 5.532,5.633 5.532,4.568 5.8,4.3 8.331,4.3 10.77,1.861 13.117,1.861 13.43,2.174 13.43,2.33 14.36,3.26 15.482,3.26 17.602,1.14 25.54,1.14 v1(27.1,2.7) ; JMS583.7@29.7,11.2 30.343,11.2 31.062,11.92 31.083,11.92 31.363,12.2 v1(31.4,12.2)
  Bottom Layer 1 w0.2: v1(27.1,2.7) 32.06,7.66 32.06,11.54 v1(31.4,12.2)
GPIO4: JMS583.8 R7.1 | length 62.9
  Top Layer 1 w0.2: JMS583.8@29.7,11.6 30.154,11.6 30.523,11.97 30.523,12.203 v1(30.6,12.28)
  VCC w0.2: v1(6.6,21.9) 9.8,21.9 10.9,23 v1(14.1,23)
  Bottom Layer 1 w0.2: R7.1@6.582,19.496 6.591,19.505 6.591,21.891 v1(6.6,21.9) ; v1(14.1,23) 14.14,23.04 28.265,23.04 32.12,19.185 32.12,13.185 31.815,12.88 31.065,12.88 29.18,14.765 29.18,20.474 28.729,20.925 25.461,20.925 24.88,20.344 24.88,18.416 24.68,18.216 24.68,17.185 26.464,15.4 27.635,15.4 29.419,13.616 29.419,13.461 v1(30.6,12.28)
GPIO8: H1.3 JMS583.13 | length 35.4
  Top Layer 1 w0.2: H1.3@7.5,23.2 8.3,22.4 v1(13.4,22.4) ; JMS583.13@29.7,13.6 30.344,13.6 30.585,13.36 31.56,13.36 v1(31.6,13.4)
  Bottom Layer 1 w0.2: v1(13.4,22.4) 13.8,22 13.8,21.6 14.6,20.8 15.547,20.8 17.467,22.72 28.133,22.72 31.6,19.253 v1(31.6,13.4)
GPIO9: H1.2 JMS583.14 | length 34.4
  Top Layer 1 w0.2: H1.2@6.5,23.2 7.9,21.8 v1(12.7,21.8) ; JMS583.14@29.7,14 30.572,14 30.692,13.88 v1(30.8,13.88)
  Bottom Layer 1 w0.2: v1(12.7,21.8) 12.7,21.692 13.992,20.4 15.6,20.4 17.6,22.4 28,22.4 30.8,19.6 v1(30.8,13.88)
LXO: JMS583.64 L2.2
M.2_3V3: C1.1 C3.2 C16.1 C18.2 L1.2 M.2.2 M.2.4 M.2.12 M.2.14 M.2.16 M.2.18 M.2.70 M.2.72 M.2.74 R6.1 | length 18.4
  Bottom Layer 1 w0.2: R6.1@3.433,8.1 3.433,6.21 9.043,0.6 v1(17.6,0.6)
  other v1: 18.2,0.6 18.8,0.6 19.4,0.6 20,0.6 29.4,1 30.2,1 31,1 29.8,1.4 30.6,1.4 29.4,1.8 30.2,1.8 31,1.8 15.7,17.9 16.3,17.9 15.7,18.5 16.3,18.5 18.2,21.7 18.8,21.7 19.4,21.7 20,21.7